# Altium PCB Notecarier-F.PcbDoc (part 1 of 3)
Units mm, origin at the board's own origin, x right, y up, seen from the top; angles counter-clockwise.
Board outline 50.8 x 103 mm, 4 copper layers (Top Layer, Mid Layer 3, Mid Layer 4, Bottom Layer), stack 1.58 mm thick; 102 components, 110 nets, 555 pads, 589 vias.
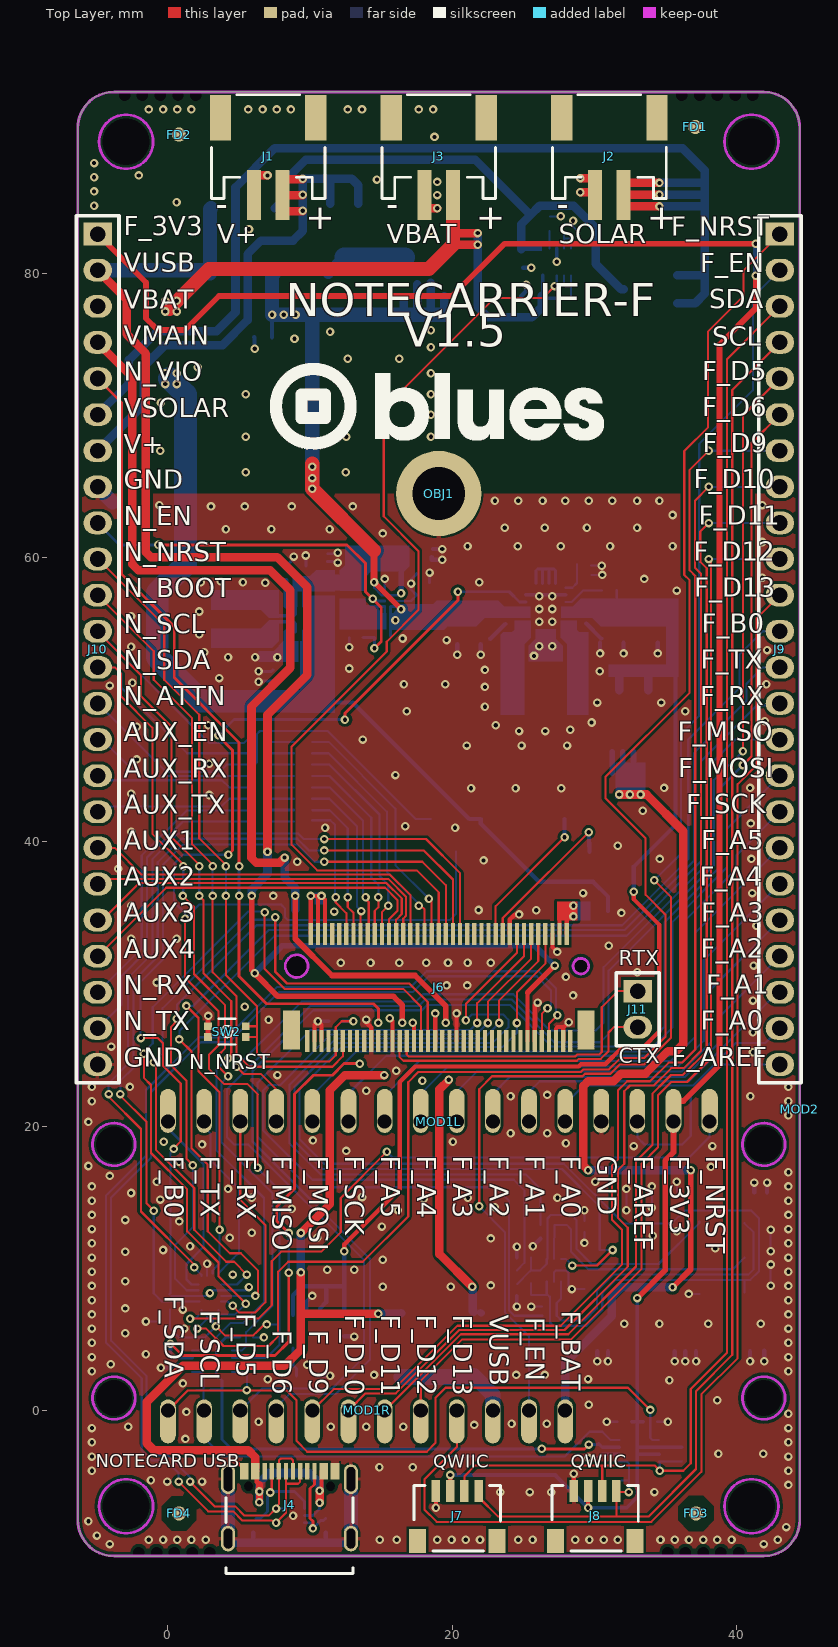
[diagram p0: Top Layer view]
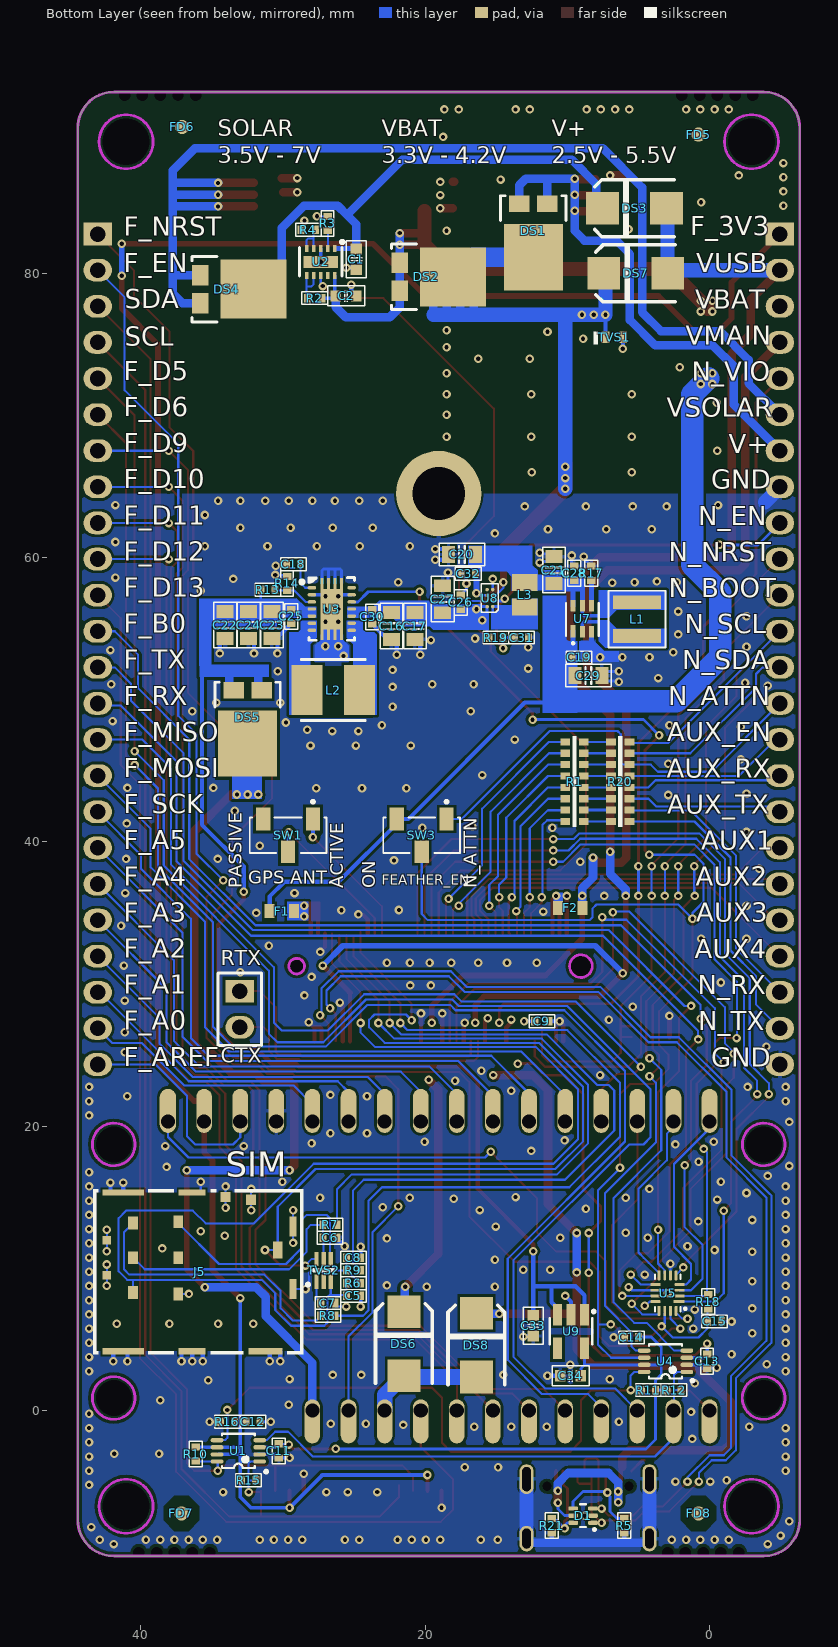
[diagram p1: Bottom Layer view, seen from below]
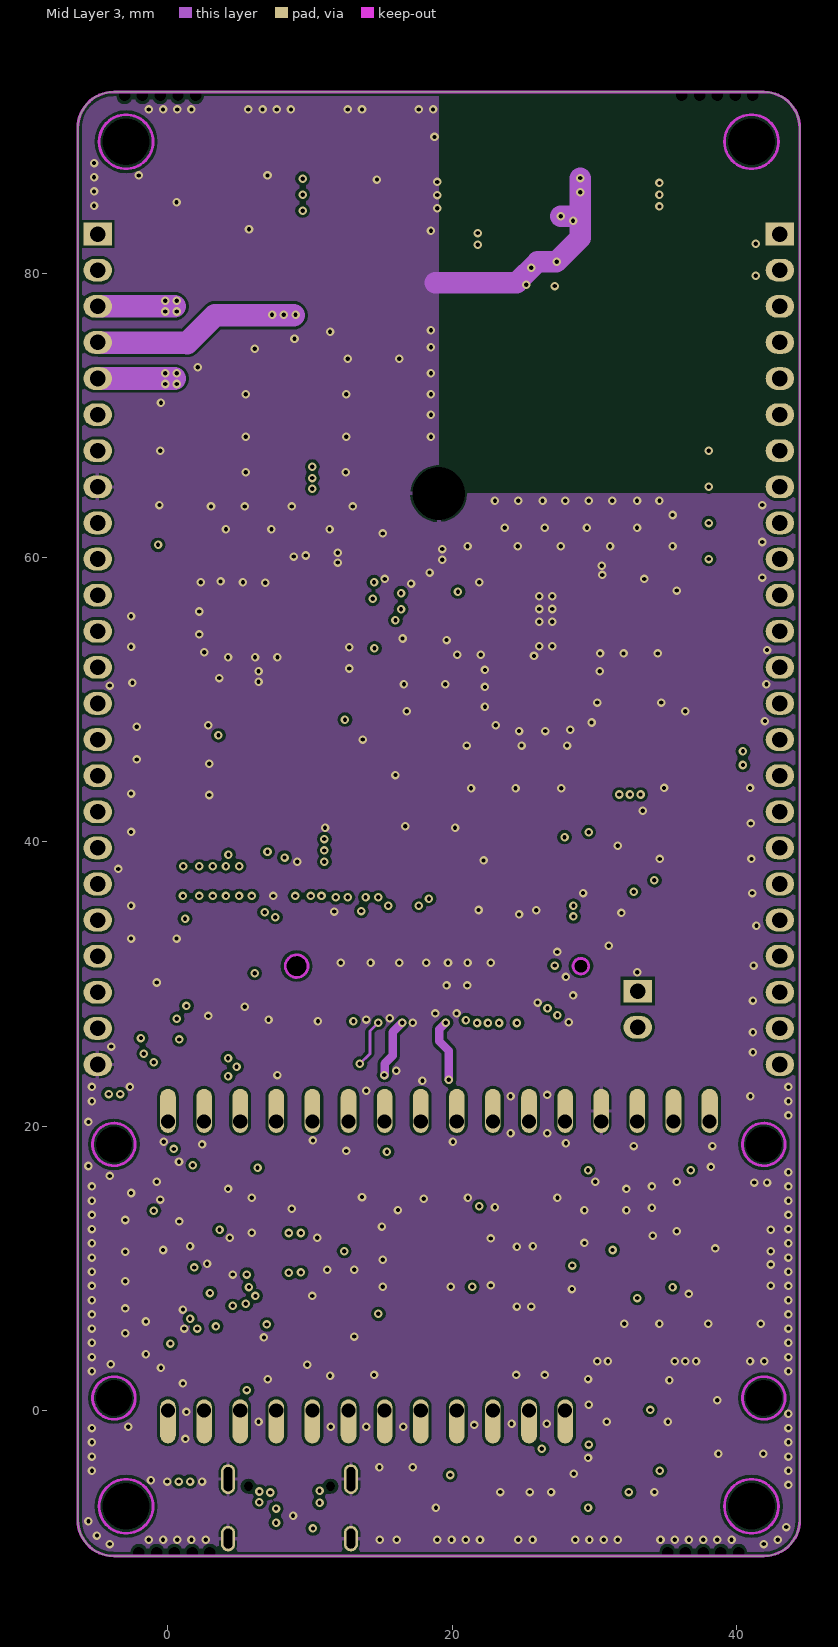
[diagram p2: Mid Layer 3]
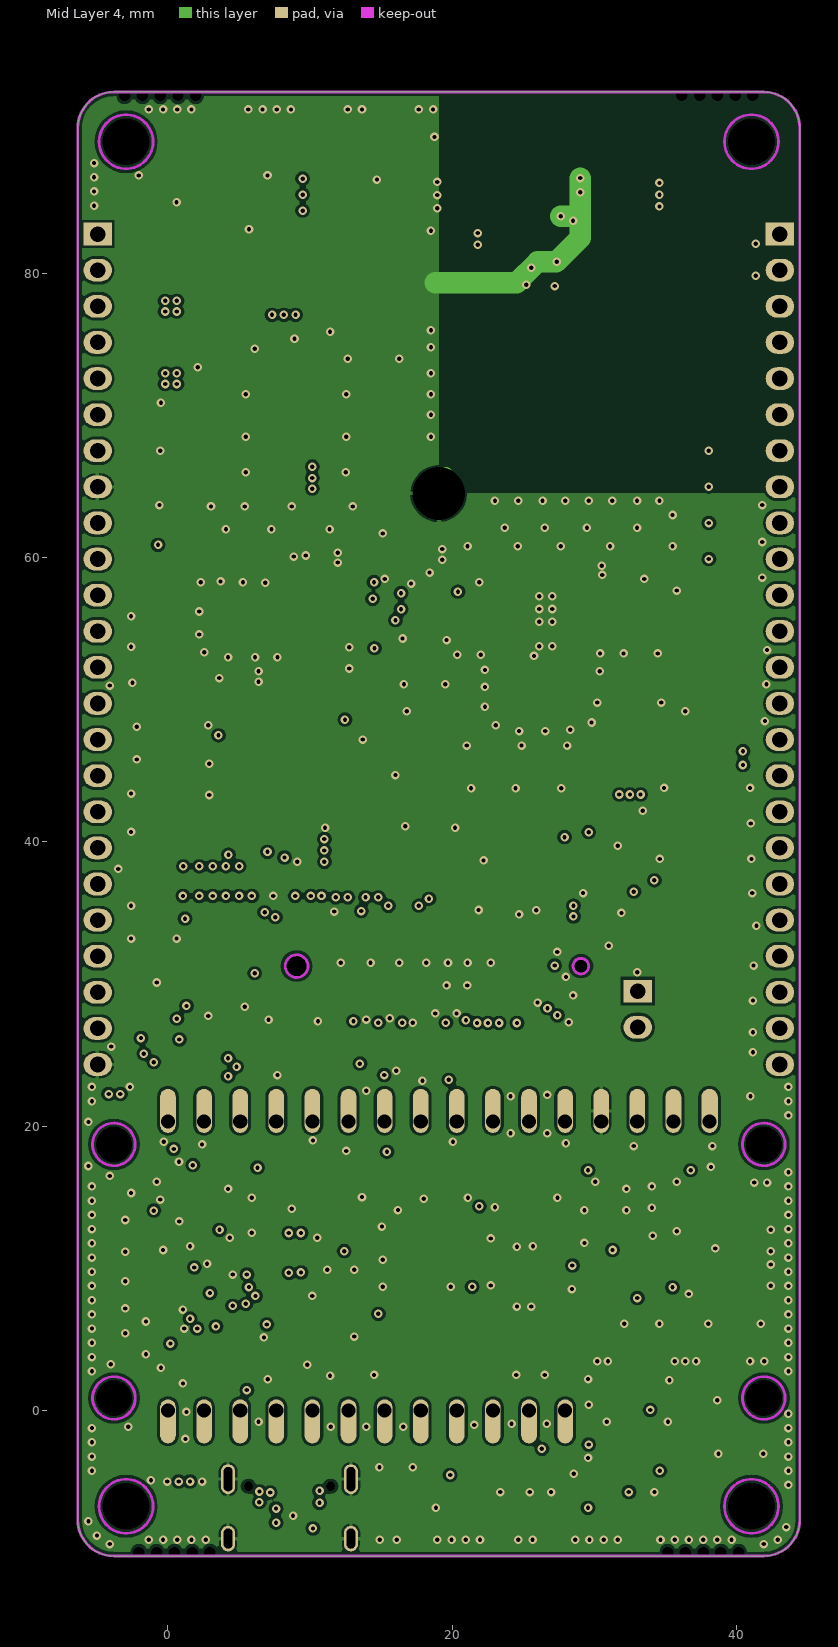
[diagram p3: Mid Layer 4]

## Layer stack, top to bottom
Top Solder: solder mask 0.0152, Solder Resist, Dk 3.5
Top Layer: signal copper 0.0483
Top Prepreg: prepreg 0.1092, Dk 4.2
Mid Layer 3: signal copper 0.0356
Bottom Core: core 1.1938, Dk 4.2
Mid Layer 4: signal copper 0.0356
Bottom Prepreg: prepreg 0.1092, Dk 4.2
Bottom Layer: signal copper 0.0483
Bottom Solder: solder mask 0.0152, Solder Resist, Dk 3.5

## Board outline
-6.35,-7.7 ccw(c-3.81,-7.7) -3.81,-10.24 41.91,-10.24 ccw(c41.91,-7.7) 44.45,-7.7 44.45,90.22 ccw(c41.91,90.22) 41.91,92.76 -3.81,92.76 ccw(c-3.81,90.22) -6.35,90.22

## Design rules (kind name [scope] priority, off if disabled: settings)
Clearance "Clearance Polygon" [InPoly] p1: gap=0.2 ignorepadtopadclearanceinfootprint=FALSE except(0: Arc-Hole Track-Hole SMDPad-Hole THPad-Hole Via-Hole Fill-Hole Poly-Hole Region-Hole Text-Hole)
Clearance [InAnyNet vs InAnyNet] p2: gap=0.15 ignorepadtopadclearanceinfootprint=FALSE except(0: Arc-Hole Track-Hole SMDPad-Hole THPad-Hole Via-Hole Fill-Hole Poly-Hole Region-Hole Text-Hole)
ComponentClearance ComponentClearance_SidePins [HasFootprint('PCB_Contact_side_0.7mm') vs HasFootprint('PCB_Contact_side_0.7mm')] p1: gap=0 collisioncheckmode=3 verticalgap=0 showdistances=FALSE
ComponentClearance ComponentClearance_GNSSantenna [InComponent('R38') vs InComponent('ANT3')] p2: gap=0 collisioncheckmode=3 verticalgap=0 showdistances=FALSE
ComponentClearance ComponentClearance_SW_jumper [InComponent('R28') vs InComponent('S1')] p3: gap=0 collisioncheckmode=3 verticalgap=0 showdistances=FALSE
ComponentClearance ComponentClearance_Shield [InComponent('SHIELD1')] p4: gap=0 collisioncheckmode=3 verticalgap=0 showdistances=FALSE
ComponentClearance ComponentClearance_PCBAntena [(HasFootprint('ANTENNA 2.4 GHZ PCB MICRO SIZE') or HasFootprint('Fiducial mark 1mm'))] p5: gap=0 collisioncheckmode=3 verticalgap=0 showdistances=FALSE
ComponentClearance [All] p6: gap=0.1 collisioncheckmode=3 verticalgap=0.254 showdistances=FALSE
DiffPairsRouting [InDifferentialPairClass('All Differential Pairs')] p1: maxlimit=0.2 minlimit=0.2 mostfreqgap=0.2 toplayer_minwidth=0.15 toplayer_maxwidth=0.15 toplayer_prefwidth=0.15 midlayer1_minwidth=0.15 midlayer1_maxwidth=0.15 midlayer1_prefwidth=0.15 midlayer2_minwidth=0.15 midlayer2_maxwidth=0.15 midlayer2_prefwidth=0.15 bottomlayer_minwidth=0.15 bottomlayer_maxwidth=0.15 bottomlayer_prefwidth=0.15 maxuncoupledlength=20
FabricationTestPointUsage TestPointUsage [All] p1: valid=0 allowmultiple=FALSE
FabricationTestpoint Testpoint [All] p1: side=3 testpointundercomponent=TRUE minsize=1.016 maxsize=2.54 preferedsize=1.524 minholesize=0 maxholesize=1.016 preferedholesize=0.813 testpointgrid=0.025 allowsidetop=TRUE allowsidebottom=TRUE usegrid=TRUE gridtolerance=0
HoleSize [All] p1: absolutevalues=TRUE maxlimit=5.08 minlimit=0.1 maxpercent=80.000 minpercent=20.000
HoleToHoleClearance [All] p1: gap=0.2 allowstackedmicrovias=TRUE
MinimumSolderMaskSliver [All] p1: minsoldermaskwidth=0
NetAntennae [InNet('NetA1_1')] p1: netantennaetolerance=500
PasteMaskExpansion [All] p1: expansion=-0.025
PlaneClearance [All] p1: clearance=0.3
PlaneConnect PlaneConnect_Via [Isvia] p1: planeconnectstyle=Direct reliefexpansion=0.508 reliefentries=4 reliefconductorwidth=0.254 reliefairgap=0.254
PlaneConnect [All] p2: planeconnectstyle=Relief reliefexpansion=0.2 reliefentries=4 reliefconductorwidth=0.25 reliefairgap=0.2
PolygonConnect PolygonConnect_Shield [HasFootprint('SHIELD CUSTOM NRF52832 MODULE')] p1: connectstyle=Direct reliefconductorwidth=0.254 reliefentries=4 polygonreliefangle="90 Angle" airgapwidth=0.254
PolygonConnect PolygonConnect_Via [IsVia] p2: connectstyle=Direct reliefconductorwidth=0.254 reliefentries=4 polygonreliefangle="90 Angle" airgapwidth=0.254
PolygonConnect [All] p3: connectstyle=Relief reliefconductorwidth=0.254 reliefentries=4 polygonreliefangle="90 Angle" airgapwidth=0.15
RoutingVias [All] p1: holewidth=0.3 width=0.6 viastyle="Through Hole" minholewidth=0.1 minwidth=0.3 maxholewidth=0.3 maxwidth=0.6
ShortCircuit "PCB Antenna" [(HasFootprint('Antenna 2.4 GHz PCB Small Size'))] p1: allowed=TRUE
ShortCircuit [All] p2: allowed=FALSE
SilkToSilkClearance [All] p1: silktosilkclearance=0.01
SilkToSolderMaskClearance SilkscreenOverComponentPads [IsPad] p1: minsilkscreentomaskgap=0.1 clearancetoexposedcopper=TRUE
SolderMaskExpansion [All] p1: expansion=0.1 istentingtop=FALSE
Width [All] p1: maxlimit=2 minlimit=0.15 preferedwidth=0.15 checkconnectedcopper=TRUE
16 further rules are at their usual default settings.

## Classes and differential pairs
differential pair D: +D_P -D_N

## Components (designator, comment, footprint, x,y, rotation, side; value= is the part's Value field where it differs from the comment)
C1 "1u" C-0603 24.845,80.985 r90 bottom
C2 "1u" C-0603 25.575,78.41 r0 bottom
C5 "100n" C-0402 25.05,8.06 r0 bottom
C6 "33p" C-0402 26.7,12.16 r0 bottom
C7 "33p" C-0402 26.85,7.56 r0 bottom
C8 "33p" C-0402 25.05,10.76 r0 bottom
C9 "100n" C-0402 11.8,27.385 r0 bottom
C11 "100n" C-0402 30.3,-2.84 r270 bottom
C12 "100n" C-0402 32.125,-0.79 r180 bottom
C13 "100n" C-0402 0.175,3.46 r270 bottom
C14 "100n" C-0402 5.5,5.135 r0 bottom
C15 "100n" C-0402 -0.35,6.26 r0 bottom
C16 "22u" C-0805 22.375,55.185 r90 bottom
C17 "22u" C-0805 20.725,55.185 r90 bottom
C18 "100n" C-0402 29.275,59.535 r180 bottom
C19 "100n" C-0402 9.175,52.975 r0 bottom
C20 "22u" C-0805 17.425,60.225 r0 bottom
C21 "22u" C-0805 10.95,59.125 r270 bottom
C22 "22u" C-0805 34.075,55.26 r270 bottom
C23 "22u" C-0805 30.775,55.26 r270 bottom
C24 "22u" C-0805 32.425,55.26 r270 bottom
C25 "100n" C-0402 29.425,55.86 r90 bottom
C26 "100n" C-0402 17.5,56.85 r270 bottom
C27 "22u" C-0805 18.775,57.075 r270 bottom
C28 "100n" C-0402 9.525,58.9 r270 bottom
C29 "22u" C-0805 8.525,51.7 r180 bottom
C30 "100n" C-0402 23.725,55.835 r90 bottom
C31 "100n" C-0402 13.225,54.375 r0 bottom
C32 "100n" C-0402 16.975,58.875 r180 bottom
C33 "1u" C-0603 12.4,5.96 r90 bottom
C34 "1u" C-0603 9.775,2.435 r180 bottom
D1 "D5V0F4U6V-7" SOT-563 8.9,-7.4 r90 bottom
DS1 "FSV1045V" TO277-3 12.4,82.135 r0 bottom
DS2 "FSV1045V" TO277-3 19.05,79.76 r270 bottom
DS3 "STPS3H100U" SMB 5.275,84.585 r0 bottom
DS4 "FSV1045V" TO277-3 33.075,78.885 r270 bottom
DS5 "FSV1045V" TO277-3 32.5,47.91 r0 bottom
DS6 "STPS3H100U" SMB 21.5,4.7 r90 bottom
DS7 "STPS3H100U" SMB 5.2,80 r0 bottom
DS8 "STPS3H100U" SMB 16.4,4.6 r90 bottom
F1 "SF-0603F150-2" FS-0603 30.1,35.135 r180 bottom
F2 "046703.5NR" FS-0603 9.8,35.36 r0 bottom
FD1 "Fiducial mark" "Fiducial mark 1mm" 37.1,90.3 r0 top
FD2 "Fiducial mark" "Fiducial mark 1mm" 0.775,89.76 r0 top
FD3 "Fiducial mark" "Fiducial mark 1mm" 37.15,-7.24 r0 top
FD4 "Fiducial mark" "Fiducial mark 1mm" 0.775,-7.24 r0 top
FD5 "Fiducial mark" "Fiducial mark 1mm" 0.775,89.76 r180 bottom
FD6 "Fiducial mark" "Fiducial mark 1mm" 37.1,90.3 r180 bottom
FD7 "Fiducial mark" "Fiducial mark 1mm" 37.15,-7.24 r180 bottom
FD8 "Fiducial mark" "Fiducial mark 1mm" 0.775,-7.24 r180 bottom
J1 "S2BPHSM4TBLFSN" "JST S2B-PH-SM4-TB" 7.05,89.76 r0 top locked
J2 "S2BPHSM4TBLFSN" "JST S2B-PH-SM4-TB" 31.05,89.76 r0 top locked
J3 "S2BPHSM4TBLFSN" "JST S2B-PH-SM4-TB" 19.05,89.76 r0 top locked
J4 "12402012E212A" CONN_12402012E212A 8.55,-6.64 r0 top
J5 "SF72S006VBDR2500" J-NANOSIM-SF72S006VBA 36.5,9.76 r270 bottom locked
J6 "MDT420E01001" J-75-0050-MOS-M2 19.05,29.76 r180 top locked
J7 "SM04B-SRSS-TB(LF)(SN)" "JST SM04B-SRSS-TB" 20.35,-7.683 r180 top
J8 "SM04B-SRSS-TB(LF)(SN)" "JST SM04B-SRSS-TB" 30.05,-7.683 r180 top locked
J9 "12736" CES-124-01-S-S 43.05,82.76 r0 top locked
J10 "12736" CES-124-01-S-S -4.95,82.76 r0 top locked
J11 "CES-102-01-S-S" CONN_02 33.05,29.5 r0 top
L1 "2u2" IND_XFL4020-222MEC 5.1,55.675 r90 bottom
L2 "1.5uH" VCHA042A-1R5MS6 26.475,50.685 r180 bottom
L3 "2u2" 1285AS-H-2R2M=P2-INDC2016X100N 13,57.375 r270 bottom
MOD1L "00542" 16PIN_254MM 38.1,20.32 r180 top
MOD1R "00536" 12PIN_254MM 27.94,0 r180 top
MOD2 "Feather Module" BLUES_WIRELESS_SWAN_2-54_HEADERS 44.45,21.19 r180 top locked
OBJ1 "9774025151R" DIST-WASMSIM0250 19.05,64.51 r0 top locked
R1 "100R" RESCAV80P640X160X70-16N 9.5,44.235 r90 bottom
R2 "10k" R-0402 27.775,78.26 r180 bottom
R3 "470R" R-0402 26.875,83.51 r270 bottom
R4 "10k" R-0402 28.225,83.06 r180 bottom
R5 "5k1" R-0402 6,-8.1 r90 bottom
R6 "15k" R-0402 25.05,8.96 r0 bottom
R7 "22R" R-0402 26.7,13.06 r0 bottom
R8 "22R" R-0402 26.85,6.66 r0 bottom
R9 "22R" R-0402 25.05,9.86 r0 bottom
R10 "10k" R-0402 36.15,-3.065 r90 bottom
R11 "10k" R-0402 4.3,1.435 r180 bottom
R12 "10k" R-0402 2.5,1.435 r0 bottom
R13 "1M1" R-0402 31.075,57.735 r0 bottom
R14 "180k" R-0402 29.725,58.185 r270 bottom
R15 "10k" R-0402 32.425,-4.915 r0 bottom
R16 "10k" R-0402 33.925,-0.79 r0 bottom
R17 "82k" R-0402 8.325,58.9 r90 bottom
R18 "100k" R-0402 0.1,7.66 r270 bottom
R19 "10M" R-0402 15.025,54.375 r0 bottom
R20 "100R" RESCAV80P640X160X70-16N 6.275,44.235 r90 bottom
R21 "5k1" R-0402 11.1,-8.1 r270 bottom
SW1 "CJS-1200TA" SW_CJS-1200TA 29.65,40.46 r0 bottom
SW2 "EVP-BB2A9B000" SW_EVP-BB2A9B000 4.15,26.66 r180 top
SW3 "CJS-1200TA" SW_CJS-1200TA 20.25,40.46 r0 bottom
TVS1 "ESDA7P120-1U1M" DIOC_160X100X60 6.7,75.5 r0 bottom
TVS2 "PESD5V0L5UV,125" SOT666 27.15,9.86 r180 bottom
U1 "TXS0102DCUR" SOP50P310X90-8N 33.15,-2.84 r0 bottom
U2 "BQ24210DQCT" WSON10-EXP 27.353,80.807 r270 bottom
U3 "TPS63020DSJR" "TI PVSON-14 DSJ" 26.575,56.385 r180 bottom
U4 "TXS0102DCUR" SOP50P310X90-8N 3.1,3.46 r0 bottom
U5 "NX3L2467GU,115" QFN40P180X260X55-16N 2.95,8.26 r0 bottom
U7 "MAX17225ELT+" MAX17225ELT+UDFN 9.6,54.775 r90 bottom
U8 "TPS62748YFPT" TPS62748YFPT-DSBGA4x2 15.25,56.55 r0 bottom
U9 "AP2139AK-3.3TRG1" SOT-23-5(M5) 9.747,5.56 r0 bottom

## Footprints (in the part's own frame and the unit in brackets; to place one, negate y for a bottom-side part, rotate by r counter-clockwise, add the part's x,y. Pads: shape width x height; smd on the part's side, far side on the other; paste and mask are expansions set on the pad)
12PIN_254MM [mm]
  rrect100% 1.1x3.1 hole 1 copper offset 0,0.762: 1(0,0) 2(2.54,0) 3(5.08,0) 4(7.62,0) 5(10.16,0) 6(12.7,0) 7(15.24,0) 8(17.78,0) 9(20.32,0) 10(22.86,0) 11(25.4,0) 12(27.94,0)
  body extent -1.27,-1.52 29.21,1.52, height 5.09
16PIN_254MM [mm]
  rrect100% 1.16x3.1 hole 1 copper offset 0,-0.762: 1(0,0)
  rrect100% 1.1x3.1 hole 1 copper offset 0,-0.762: 2(2.54,0) 3(5.08,0) 4(7.62,0) 5(10.16,0) 6(12.7,0) 7(15.24,0) 8(17.78,0) 9(20.32,0) 10(22.86,0) 11(25.4,0) 12(27.94,0) 13(30.48,0) 14(33.02,0) 15(35.56,0) 16(38.1,0)
  body extent -1.27,-1.52 39.37,1.52, height 5.09
1285AS-H-2R2M=P2-INDC2016X100N [mm]
  rect 1.2x1.82 smd: 1(-0.86,0) 2(0.86,0)
  body extent -1,-0.8 1,0.8, height 1.2
BLUES_WIRELESS_SWAN_2-54_HEADERS [mm]
C-0402 [mm] "Chip Capacitor; Body 1 x 0.5 mm (LxW typ)"
  rect 0.5x0.6 smd paste-0.025 mask+0.05: 1(-0.5,0) 2(0.5,0)
  silkscreen extent -0.9,-0.45 0.9,0.45, body extent -0.5,-0.28 0.5,0.28, height 0.5
C-0603 [mm] "Chip Capacitor; Body 1.6 x 0.8 mm (LxW typ)"
  rect 0.75x0.8 smd paste-0.025: 1(-0.725,0) 2(0.725,0)
  silkscreen extent -1.3,-0.7 1.3,0.7, body extent -0.8,-0.48 0.8,0.44, height 0.8
C-0805 [mm] "Chip Capacitor; Body 2.0 x 1.2 mm (LxW typ)"
  rect 0.9x1.2 smd paste-0.025: 1(-0.95,0) 2(0.95,0)
  silkscreen extent -1.6,-0.8 1.6,0.8, body extent -1,-0.6 1,0.6, height 0.94
CES-124-01-S-S [mm] "24x1 0.1\" female headers"
  rect 2x1.6 hole 1.1: 1(0,0)
  oval 2x1.6 hole 1.1: 2(0,-2.54) 3(0,-5.08) 4(0,-7.62) 5(0,-10.16) 6(0,-12.7) 7(0,-15.24) 8(0,-17.78) 9(0,-20.32) 10(0,-22.86) 11(0,-25.4) 12(0,-27.94) 13(0,-30.48) 14(0,-33.02) 15(0,-35.56) 16(0,-38.1) 17(0,-40.64) 18(0,-43.18) 19(0,-45.72) 20(0,-48.26) 21(0,-50.8) 22(0,-53.34) 23(0,-55.88) 24(0,-58.42)
  silkscreen extent -1.5,-59.7 1.5,1.3, body extent -1.52,-59.7 1.52,1.26, height 5.09
CONN_02 [mm] "0.1\" 2 PIN header"
  rect 2x1.6 hole 1.1: 1(0,0)
  oval 2x1.6 hole 1.1: 2(0,-2.54)
  silkscreen extent -1.5,-3.84 1.5,1.3
CONN_12402012E212A [mm] "Amphenol USB C receptacle"
  round 0 hole 0.65 unplated: 0(-2.89,1.308) 0(2.89,1.308)
  rect 0.3x1.15 smd: A1(-3.35,2.373) A4(-2.55,2.373) A5(-1.25,2.373) A6(-0.25,2.373) A7(0.25,2.373) A8(1.25,2.373) A9(2.55,2.373) A12(3.35,2.373) B1(3.05,2.373) B4(2.25,2.373) B5(1.75,2.373) B6(0.75,2.373) B7(-0.75,2.373) B8(-1.75,2.373) B9(-2.25,2.373) B12(-3.05,2.373)
  oval 0.6x1.4 smd: M(-4.32,-2.372)
  oval 1x1.8 smd: M(-4.32,-2.372) M(4.32,-2.372)
  oval 1x1.8 hole 0.6 slot 1.4 at 90 deg: M(-4.32,-2.372) M(4.32,-2.372)
  oval 1x2.1 smd: M(-4.32,1.808) M(4.32,1.808)
  oval 1x2.1 hole 0.6 slot 1.7 at 90 deg: M(-4.32,1.808) M(4.32,1.808)
  silkscreen extent -4.48,-4.83 4.48,0.5, body extent -4.47,-4.98 4.47,2.62, height 3.32
DIOC_160X100X60 [mm] "Drawn by: Duracic; Verified by: *"
  rect 0.55x0.8 smd paste-0.025 mask+0.1: 1(-0.625,0) 2(0.625,0)
  silkscreen extent 1.15,-0.4 1.45,0.5, body extent -0.8,-0.5 0.8,0.5, height 0.61
DIST-WASMSIM0250 [mm]
  round 6 smd paste-10: 1(0,0)
  round 6 / inner round 1.524 / far side round 6 hole 3.7: 1(0,0)
  body extent -2.55,-2.55 2.55,2.55, height 2.5
"Fiducial mark 1mm" [mm] "1 mm diameter"
  round 1 smd paste+0 mask+0.6: 1(0,0)
  Top Layer pour cut-out: -1.25,0.5 -0.5,1.25 0.5,1.25 1.25,0.5 1.25,-0.5 0.5,-1.25 -0.5,-1.25 -1.25,-0.5
FS-0603 [mm]
  rect 0.7x1 smd: 1(-0.85,0) 2(0.85,0)
  body extent -0.8,-0.43 0.8,0.43, height 0.86
IND_XFL4020-222MEC [mm]
  rect 0.98x3.4 smd: 1(-1.185,0) 2(1.185,0)
  silkscreen extent -2,-2 2,2
J-75-0050-MOS-M2 [mm]
  rect 0.3x1.55 smd: 1(-9.25,3.775) 2(-9,-3.775) 3(-8.75,3.775) 4(-8.5,-3.775) 5(-8.25,3.775) 6(-8,-3.775) 7(-7.75,3.775) 8(-7.5,-3.775) 9(-7.25,3.775) 10(-7,-3.775) 11(-6.75,3.775) 12(-6.5,-3.775) 13(-6.25,3.775) 14(-6,-3.775) 15(-5.75,3.775) 16(-5.5,-3.775) 17(-5.25,3.775) 18(-5,-3.775) 19(-4.75,3.775) 20(-4.5,-3.775) 21(-4.25,3.775) 22(-4,-3.775) 23(-3.75,3.775) 24(-3.5,-3.775) 25(-3.25,3.775) 26(-3,-3.775) 27(-2.75,3.775) 28(-2.5,-3.775) 29(-2.25,3.775) 30(-2,-3.775) 31(-1.75,3.775) 32(-1.5,-3.775) 33(-1.25,3.775) 34(-1,-3.775) 35(-0.75,3.775) 36(-0.5,-3.775) 37(-0.25,3.775) 38(0,-3.775) 39(0.25,3.775) 40(0.5,-3.775) 41(0.75,3.775) 42(1,-3.775) 43(1.25,3.775) 44(1.5,-3.775) 45(1.75,3.775) 46(2,-3.775) 47(2.25,3.775) 48(2.5,-3.775) 49(2.75,3.775) 50(3,-3.775) 51(3.25,3.775) 52(3.5,-3.775) 53(3.75,3.775) 54(4,-3.775) 55(4.25,3.775) 56(4.5,-3.775) 57(4.75,3.775) 58(5,-3.775) 59(5.25,3.775) 60(5.5,-3.775) 61(5.75,3.775) 62(6,-3.775) 63(6.25,3.775) 64(6.5,-3.775) 65(6.75,3.775) 66(7,-3.775) 67(7.25,3.775) 68(7.5,-3.775) 69(7.75,3.775) 70(8,-3.775) 71(8.25,3.775) 72(8.5,-3.775) 73(8.75,3.775) 74(9,-3.775) 75(9.25,3.775)
  round 0 hole 1.1 unplated: AH(-10,-1.5)
  round 0 hole 1.6 unplated: AH(10,-1.5)
  rect 1.2x2.75 smd: ""(-10.35,3) ""(10.35,3)
  body extent -10.95,-4.37 10.95,4.33, height 4.1
J-NANOSIM-SF72S006VBA [mm]
  rect 0.9x0.7 smd: 1(1.46,-4.05) 2(-0.98,-4.05) 3(-3.42,-4.05) 5(1.56,-0.88) 6(-0.98,-0.88) 7(-3.52,-0.88)
  rect 0.45x2.9 smd: 8(-5.575,-4.75) 17(5.6,-4.75)
  rect 0.45x1.9 smd: 9(-5.575,0.1) 16(5.6,0.1)
  rect 0.7x0.7 smd: 10(-5.25,2.45)
  rect 0.75x0.7 smd: 11(-5.075,4.25)
  rect 1.4x0.5 smd: 12(-3.18,7.2) 14(1.22,7.2)
  rect 1.2x0.65 smd: 13(-1.53,6.125)
  rect 0.45x2.4 smd: 15(5.6,5.25)
  rect 0.6x0.6 smd: 18(0.24,-5.9) 19(-2.2,-5.9)
  Top Layer pour cut-out: 5.6,-6.65 -5.6,-6.65 -5.6,7.7 5.6,7.7 5.6,-6.65
  silkscreen extent -5.8,-6.85 5.8,7.9, body extent -5.58,-7.43 5.64,7.62, height 1.25
"JST S2B-PH-SM4-TB" [mm] "JST PH Series 2mm pitch, side entry connector"
  rect 1x3.5 smd paste-5: 1(-1,-4.25) 2(1,-4.25)
  rect 1.5x3.2 smd: M(-3.35,1.2) M(3.35,1.2)
  silkscreen extent -4,-4.5 4,2.8, body extent -3.95,-5.6 3.95,3.01, height 5.6
"JST SM04B-SRSS-TB" [mm] "1.0mm pitch/Disconnectable Crimp style connector"
  rect 0.6x1.55 smd: 1(-1.5,-2.032) 2(-0.5,-2.032) 3(0.5,-2.032) 4(1.5,-2.032)
  rect 1.2x1.7 smd: M(-2.8,1.5) M(2.8,1.5)
  silkscreen extent -3.03,-2.41 3.03,2.2, body extent -3,-2.38 3,2.57, height 2.95
MAX17225ELT+UDFN [mm]
  rect 0.9x0.35 smd: 1(0.05,0)
  rect 0.8x0.35 smd: 2(0,-0.65) 3(0,-1.3) 4(1.83,-1.3) 5(1.83,-0.65) 6(1.83,0)
  silkscreen extent -0.88,-1.81 2.03,0.51, body extent -0.11,-1.68 1.94,0.38, height 0.79
QFN40P180X260X55-16N [mm] "Drawn by: Duracic; Verified by: Klaic"
  rrect50% 0.8x0.2 smd paste-0.025 mask+0.05: 1(-0.8,0.6)
  rrect50% 0.7x0.2 smd paste-0.025 mask+0.05: 2(-0.85,0.2) 3(-0.85,-0.2) 4(-0.85,-0.6) 9(0.85,-0.6) 10(0.85,-0.2) 11(0.85,0.2) 12(0.85,0.6)
  rrect50% 0.2x0.7 smd paste-0.025 mask+0.05: 5(-0.6,-1.25) 6(-0.2,-1.25) 7(0.2,-1.25) 8(0.6,-1.25) 13(0.6,1.25) 14(0.2,1.25) 15(-0.2,1.25) 16(-0.6,1.25)
  silkscreen extent -1.33,-1.3 0.9,1.3, body extent -0.91,-1.31 0.91,1.31, height 0.56
R-0402 [mm] "Chip Resistor; Body 1 x 0.5 mm (LxW typ)"
  rect 0.5x0.6 smd paste-0.025 mask+0.05: 1(-0.5,0) 2(0.5,0)
  silkscreen extent -0.9,-0.45 0.9,0.45, body extent -0.5,-0.25 0.5,0.25, height 0.38
RESCAV80P640X160X70-16N [mm] "Drawn by:Duracic; Verified by: Klaic"
  rect 0.5x0.7 smd paste-0.025 mask+0.05: 1(-2.8,-0.65) 2(-2,-0.65) 3(-1.2,-0.65) 4(-0.4,-0.65) 5(0.4,-0.65) 6(1.2,-0.65) 7(2,-0.65) 8(2.8,-0.65) 9(2.8,0.65) 10(2,0.65) 11(1.2,0.65) 12(0.4,0.65) 13(-0.4,0.65) 14(-1.2,0.65) 15(-2,0.65) 16(-2.8,0.65)
  silkscreen extent -3.2,-0.15 3.2,0.15, body extent -3.2,-0.8 3.2,0.8, height 0.51
SMB [mm] "DO-214-AA/SMB; 2 C-Bend Leads; Body 5.3 x 3.6 mm, inc. leads (LxW)"
  rect 2.3x2.3 smd: 1(2.25,0) 2(-2.25,0)
  silkscreen extent -2.8,-2 2.8,2, body extent -2.79,-1.98 2.79,1.98, height 2.64
SOP50P310X90-8N [mm] "SOP50P310X90-8N Chip body 2.3x 2.0 mm"
  oval 0.9x0.3 smd mask+0.05: 1(-1.5,0.75) 2(-1.5,0.25) 3(-1.5,-0.25) 4(-1.5,-0.75) 5(1.5,-0.75) 6(1.5,-0.25) 7(1.5,0.25) 8(1.5,0.75)
  silkscreen extent -2.05,-1.2 1.15,1.56, body extent -1.58,-1.2 1.58,1.2, height 1.05
SOT666 [mm]
  rect 0.3x0.99 smd: 1(-0.5,-0.805) 2(0,-0.805) 3(0.5,-0.805) 4(0.5,0.805) 5(0,0.805) 6(-0.5,0.805)
  silkscreen extent -1.18,-1.08 0.7,0, body extent -0.79,-0.8 0.8,0.8, height 0.6
SOT-23-5(M5) [mm]
  rect 0.6x1.5 smd: 1(-0.95,-1.175) 2(0,-1.175) 3(0.95,-1.175) 4(0.95,1.175) 5(-0.95,1.175)
  silkscreen extent -1.7,-1.5 1.5,0.9, body extent -1.5,-1.5 1.5,1.5, height 1.45
SOT-563 [mm] "SOT-563; 6 Leads; Body 1.6 x 1.6 mm, inc. leads (LxW max)"
  rrect50% 0.3x0.67 smd paste-0.025 mask+0.05: 1(-0.5,-0.7) 2(0,-0.7) 3(0.5,-0.7) 4(0.5,0.7) 5(0,0.7) 6(-0.5,0.7)
  silkscreen extent -1.04,-0.87 0.8,0.2, body extent -0.8,-0.81 0.8,0.81, height 0.6
SW_CJS-1200TA [mm]
  rect 1x1.6 smd: 1(-1.75,-1.15) 2(0,1.15) 3(1.75,-1.15)
  silkscreen extent -2.7,-2.46 2.7,1.25, body extent -2.7,-1.4 2.7,1.4, height 2.5
SW_EVP-BB2A9B000 [mm] "Drawn by: Duracic; Verified by: Klaic"
  rect 0.55x0.55 smd paste-0.025 mask+0.1: 1(-1.325,-0.375) 1(-1.325,0.375) 2(1.325,-0.375) 2(1.325,0.375)
  Top Layer pour cut-out: -0.95,0.8 0.95,0.8 0.95,-0.8 -0.95,-0.8
  silkscreen extent -0.6,-0.9 0.6,0.9, body extent -1.5,-0.9 1.5,0.9, height 0.51
"TI PVSON-14 DSJ" [mm] "VSON, 14-Leads, Body 3.00x4.00mm, Pitch 0.50mm, Thermal Pad 1.58x2.85mm, IPC Medium Density"
  oval 0.6x0.24 smd: 1(-1.4,1.5) 2(-1.4,1) 3(-1.4,0.5) 4(-1.4,0) 5(-1.4,-0.5) 6(-1.4,-1) 7(-1.4,-1.5) 8(1.4,-1.5) 9(1.4,-1) 10(1.4,-0.5) 11(1.4,0) 12(1.4,0.5) 13(1.4,1) 14(1.4,1.5)
  rect 0.2x0.775 smd: 15(-0.69,-1.8) 15(-0.69,1.8) 15(-0.23,-1.8) 15(-0.23,1.8) 15(0.23,-1.8) 15(0.23,1.8) 15(0.69,-1.8) 15(0.69,1.8)
  rect 1.58x2.85 smd: 15(0,0)
  silkscreen extent -2.23,-2.2 1.6,2.21, body extent -1.58,-2.07 1.58,2.08, height 1
TO277-3 [mm]
  rect 1.45x1.15 smd: 1(0.985,-2.75) 2(-0.985,-2.75)
  rect 4.15x4.65 smd: 3(0,1)
  silkscreen extent -2.3,-3.32 2.3,-1.58, body extent -2.31,-3.32 2.32,3.33, height 1.2
TPS62748YFPT-DSBGA4x2 [mm]
  round 0.245 smd: A1(0,0) A2(0.4,0) B1(0,-0.4) B2(0.4,-0.4) C1(0,-0.8) C2(0.4,-0.8) D1(0,-1.2) D2(0.4,-1.2)
  silkscreen extent -0.4,-1.6 0.8,0.4, body extent -0.3,-1.5 0.7,0.3, height 0.69
VCHA042A-1R5MS6 [mm] "1.5uH Precision Wire Wound Inductor, 2-Leads, Body 4.20x4.00mm, IPC Medium Density"
  rect 2.2x3.5 smd: 1(-1.85,0) 2(1.85,0)
  silkscreen extent -2.25,-2.15 2.25,2.15, body extent -2.2,-2 2.2,2, height 2.2
WSON10-EXP [mm]
  rect 0.5x0.25 smd: 1(-0.95,1) 2(-0.95,0.5) 3(-0.95,0) 4(-0.95,-0.5) 5(-0.95,-1) 6(0.95,-1) 7(0.95,-0.5) 8(0.95,0) 9(0.95,0.5) 10(0.95,1)
  rect 0.84x2.4 smd: 11(0,0)
  silkscreen extent -1.5,-1.5 1,1.6, body extent -1,-1.5 1,1.5, height 0.8

## Part data
C1 C2 C33 C34: library part C0603-1u-25V-X5R, "Capacitor ceramic 1u ±10% X5R 25V", BL Part Number=2006-223, Manufacturer=Yageo, Manufacturer Part Number=CC0603KRX5R8BB105, Supplier Part Number 1=311-1445-1-ND, Checked_By=Golubic, DateModified=2022-10-07, Drawn_By=Hamin, Supplier 1=Digi-Key
C5 C9 C11 C12 C13 C14 C15 C18 C19 C25 C26 C28 C30 C31 C32: library part C0402-100n-16V-X7R, "Capacitor ceramic 100n ±10% X7R 16V 0402", BL Part Number=2000-908, Manufacturer=N/A, Supplier Part Number 1=490-3261-1-ND, Checked_By=Dodig, DateModified=27-08-2013, Drawn_By=Puskar, Manufacturer Part Number=N/A, Supplier 1=Digi-Key
C6 C7 C8: library part C0402-33p-50V-C0G-5, "Capacitor ceramic 33p ±5% C0G 50V 0402", BL Part Number=2001-377, Manufacturer=N/A, Supplier Part Number 1=1276-1272-1-ND, Checked_By=Dodig, DateModified=24-11-2013, Drawn_By=Puskar, Manufacturer Part Number=N/A, Supplier 1=Digi-Key
C16 C17 C20 C21 C22 C23 C24 C27 C29: library part C0805-22u-16V-X5R, "Capacitor ceramic 22u ±10% X5R 16V 0805", BL Part Number=2006-222, Manufacturer=N/A, Checked_By=Hamin, DateModified=28-07-2022, Drawn_By=Fumic, Manufacturer Part Number=N/A
D1: "TVS DIODE 5.5VWM 12VC SOT563", BL Part Number=2010-391, Manufacturer="Diodes Incorporated", DateModified=21-01-2026, Drawn_By=Duracic, Manufacturer Part Number=D5V0F4U6V-7
DS1 DS2 DS4 DS5: library part "SCHOTTKY - FSV1045V - 10A/45V", "DIODO SCHOTTKY 10A 45V FSV1045V TO277-3 SMT", BL Part Number=2007-712, Manufacturer=onsemi, Supplier Part Number 1=FSV1045VCT-ND, Drawn_By="Blues Wireless", Manufacturer Part Number=FSV1045V, Supplier 1=Digi-Key
DS3 DS6 DS7 DS8: library part "SCHOTTKY-STPS3H100U - 3A/100V", "DIODO SCHOTTKY 3A 100V STPS3H100U SMB SMT", BL Part Number=2007-711, Manufacturer=STMicroelectronics, Supplier Part Number 1=497-10392-1-ND, Drawn_By="Blues Wireless", Manufacturer Part Number=STPS3H100U, Supplier 1=Digi-Key
F1: library part "RAPIDO - SF-0603F150-2-1.5A/32V", "FUSIBILE RAPIDO 1.5A 32V 0603 SF-0603F150-2 BOURNS SMT", BL Part Number=2007-468, Manufacturer="Bourns Inc.", Supplier Part Number 1=SF-0603F150-2CT-ND, Drawn_By="Blues Wireless", Manufacturer Part Number=SF-0603F150-2, Supplier 1=Digi-Key
F2: "Fuse Chip Very Fast Acting 3.5A 32V SMD Solder Pad 0603 T/R CSA", BL Part Number=2007-469, Manufacturer="Littelfuse Inc.", Supplier Part Number 1=F1400CT-ND, Drawn_By="Blues Wireless", Manufacturer Part Number=046703.5NR, Supplier 1=Digi-Key
FD1 FD2 FD3 FD4 FD5 FD6 FD7 FD8: BL Part Number=N/A, Checked_By=Dodig, DateModified=17-06-2013, Drawn_By=Puskar, Manufacturer=N/A, Manufacturer Part Number=N/A
J1 J2 J3: "PH SMT SIDE ENTRY HDR 2W", BL Part Number=2007-662, Manufacturer=JST, Manufacturer Part Number="S2B-PH-SM4-K-TB (LF)(SN)", Drawn_By="Blues Wireless", Supplier 1=Digi-Key
J4: library part "Conn USB C 12402012E212A", "CONN RCP USB2.0 TYP C 24P SMD RA", BL Part Number=2008-437, Manufacturer=Amphenol, Supplier Part Number 1=664-12402012E212ATR-ND, Checked_By=Hlupic, DateModified=19-03-2024, Drawn_By=Anic-Ivicic, Manufacturer Part Number=12402012E212A, Supplier 1=Digi-Key
J5: library part "NANOSIM - J-NANOSIM-SF72S006VBA", "CONN. NANOSIM 8P F/90° PUSH-PUSH SF72S006VBAR2500 JAE ELECTRONICS SMT", BL Part Number=2007-458, Manufacturer="JAE Electronics", Supplier Part Number 1=670-2967-1-ND, Drawn_By="Blues Wireless", Manufacturer Part Number=SF72S006VBDR2500, Supplier 1=Digi-Key
J6: library part "AMPHENOL-75 - M-2 KEY E_13", "CONN. M.2 75P M/90° P=0.5 MDT420E01001 AMPHENOL SMT", BL Part Number=2007-460, Manufacturer="Amphenol ICC (FCI)", Manufacturer Part Number=MDT420E03001, Supplier Part Number 1=MDT420E03001CT-ND, Drawn_By="Blues Wireless", Supplier 1=Digi-Key
J7 J8: "CONN HEADER SH 4POS SIDE 1MM TIN", BL Part Number=2002-058, Manufacturer="JST Sales America Inc.", Supplier Part Number 1=455-1804-1-ND, Drawn_By="Blues Wireless", Manufacturer Part Number=SM04B-SRSS-TB(LF)(SN), Supplier 1=Digi-Key
J9: library part SIDECON, "24x1 0.1\" pitch half height female header", BL Part Number=2010-425, Manufacturer=4UCON, Drawn_By="Blues Wireless", Manufacturer Part Number=12736
J10: library part SIDECON_N, "24x1 0.1\" pitch half height female header", BL Part Number=2010-425, Manufacturer=4UCON, Drawn_By="Blues Wireless", Manufacturer Part Number=12736
J11: library part CONN_02, "0,1\" 2 PIN Header", BL Part Number=2007-461, Manufacturer="Samtec Inc.", Supplier Part Number 1=SAM1085-02-ND, Drawn_By="Blues Wireless", Manufacturer Part Number=CES-102-01-S-S, Supplier 1=Digi-Key
L1: library part XFL4020-222MEC, "Power Inductors - SMD 2.2Uh Shld 8A 23.5mOhms AECQ2", BL Part Number=2007-483, Manufacturer 1=Coilcraft, Supplier Part Number 1=994-XFL4020-222MEC, Drawn_By="Blues Wireless", Manufacturer Part Number 1=XFL4020-222MEC, Supplier 1=Mouser
L2: library part VCHA042A-1R5MS6, "Fixed Ind 1.5UH 7.3A 15.4 Mohm", BL Part Number=2007-451, Manufacturer=Cyntec, Supplier Part Number 1=2037-VCHA042A-1R5MS6CT-ND, Drawn_By="Blues Wireless", Manufacturer Part Number=VCHA042A-1R5MS6, Supplier 1=Digi-Key
L3: library part 1285AS-H-2R2M=P2, "FIXED IND 2.2UH 1.5A 204MOHM SMD", BL Part Number=2007-482, Manufacturer="Murata Electronics", Manufacturer Part Number=1285AS-H-2R2M=P2, Supplier Part Number 1=490-10600-1-ND, Drawn_By="Blues Wireless", Supplier 1=Digi-Key
MOD1L: library part SOCKET_LFB_16, "Socket 16-Pin, 0.100 in", BL Part Number=2010-423, Manufacturer=4UCON, Drawn_By="Blues Wireless", Manufacturer Part Number=00542
MOD1R: library part SOCKET_LFB_12, "Socket 12-Pin, 0.100 in", BL Part Number=2010-424, Manufacturer=4UCON, Drawn_By="Blues Wireless", Manufacturer Part Number=00536
MOD2: library part ADAFRUIT_FEATHER_COMMON_1, "Typical Adafruit Feather Pinout"
OBJ1: library part "DISTANZIALE - M2.5x0250", "DISTANZ. CIL. METALLO 5.1X2.5 9774025151R W.E SMT", BL Part Number=6020-113, Manufacturer="Würth Elektronik", Supplier Part Number 1=732-7078-1-ND, Drawn_By="Blues Wieless", Manufacturer Part Number=9774025151R, Supplier 1=Digi-Key
R1 R20: library part "RESCAV80P640X160X70-16N - 8x100R", "Resistor array 100R 5% 2506", BL Part Number=2007-472, Manufacturer="CTS Resistor Products", Manufacturer Part Number=742C163101JP, Supplier Part Number 1=742C163101JPCT-ND, Checked_By=Klaic, DateModified=26-11-2025, Drawn_By=Duracic, Supplier 1=Digi-Key
R2 R4 R10 R11 R12 R15 R16: library part R0402-10k-1, "Resistor 10k ±1% 0402", BL Part Number=2000-729, Manufacturer=N/A, Supplier Part Number 1=311-10.0KLRCT-ND, Checked_By=Dodig, DateModified=27-08-2013, Drawn_By=Puskar, Manufacturer Part Number=N/A, Supplier 1=Digi-Key
R3: library part R0402-470R-1, "Resistor 470R ±1% 0402", BL Part Number=2001-420, Manufacturer=N/A, Supplier Part Number 1=13-RC0402FR-13470RLCT-ND, Checked_By=Marsic, DateModified=10-07-2023, Drawn_By=Hamin, Manufacturer Part Number=N/A, Supplier 1=Digi-Key
R5 R21: library part R0402-5k1-1, "Resistor 5k1 ±1% 0402", BL Part Number=2004-098, Manufacturer=N/A, Supplier Part Number 1=P5.10KLCT-ND, Checked_By=Hamin, DateModified=21-09-2018, Drawn_By=PuskarJ, Manufacturer Part Number=N/A, Supplier 1=Digi-Key
R6: library part R0402-15k-1, "Resistor 15k ±1% 0402", BL Part Number=2001-157, Manufacturer=N/A, Supplier Part Number 1=P15.0KLCT-ND, Checked_By=Zvonc, DateModified=23-01-2015, Drawn_By=Puskar, Manufacturer Part Number=N/A, Supplier 1=Digi-Key
R7 R8 R9: library part R0402-22R-1, "Resistor 22R ±1% 0402", BL Part Number=2001-170, Manufacturer=N/A, Supplier Part Number 1=311-22.0LRCT-ND, Checked_By=Hamin, DateModified=13-02-2021, Drawn_By=Zvonc, Manufacturer Part Number=N/A, Supplier 1=Digi-Key
R13: library part R0402-1M1-1, "Resistor 1M1 ±1% 0402", BL Part Number=2000-730, Manufacturer=N/A, Supplier Part Number 1=13-RC0402FR-071M1LCT-ND, Checked_By=Kvesic, DateModified=09-10-2024, Drawn_By=Hamin, Manufacturer Part Number=N/A, Supplier 1=Digi-Key
R14: library part R0402-180k-1, "Resistor 180k ±1% 0402", BL Part Number=2001-422, Manufacturer=N/A, Checked_By=Hamin, DateModified=15-02-2018, Drawn_By=Dodig, Manufacturer Part Number=N/A
R17: library part R0402-82k-1, "Resistor 82k ±1% 0402", BL Part Number=2001-566, Manufacturer=Yageo, Manufacturer Part Number=RC0402FR-0782KL, Supplier Part Number 1=311-82.0KLRCT-ND, Checked_By=Hamin, DateModified=20-08-2014, Drawn_By=Puskar, Supplier 1=Digi-key
R18: library part R0402-100k-1, "Resistor 100k ±1% 0402", BL Part Number=2000-727, Manufacturer=N/A, Supplier Part Number 1=RHM100CDCT-ND, Checked_By=Dodig, DateModified=27-10-2013, Drawn_By=Puskar, Manufacturer Part Number=N/A, Supplier 1=Digi-Key
R19: library part R0402-10M-1, "Resistor 10M ±1% 0402", BL Part Number=2002-832, Manufacturer=N/A, Supplier Part Number 1=RC0402FR-0710ML, Checked_By=Dodig, DateModified=24-05-2016, Drawn_By=Zvonc, Manufacturer Part Number=N/A, Supplier 1=Digi-Key
SW1 SW3: "Switch Slide N.O./N.C. SPDT Raised Slide 0.1A 24VDC J-Hook SMD Embossed T/R", BL Part Number=2007-456, Manufacturer="Nidec Copal", Supplier Part Number 1=563-1021-6-ND, Drawn_By="Blues Wireless", Manufacturer Part Number=CJS-1200TA, Supplier 1=Digi-Key
SW2: library part "Switch tact EVP-BB2A9B000", "SWITCH TACTILE SPST-NO 0.02A 15V", BL Part Number=2007-124, Manufacturer="Panasonic Electronic Components", Checked_By=Duracic, DateModified=26-11-2025, Drawn_By=Marsic, Manufacturer Part Number=EVP-BB2A9B000
TVS1: "TVS DIODE 5.5VWM 11.5VC 1610", BL Part Number=2007-378, Manufacturer=STMicroelectronics, DateModified=26-01-2026, Drawn_By=Duracic, Manufacturer Part Number=ESDA7P120-1U1M
TVS2: "PESD Series 25 W 5 V Uni-Directional Fivefold ESD Protection Diode Array SOT-666", BL Part Number=2007-452, Manufacturer=Nexperia, Supplier Part Number 1=1727-5797-1-ND, Drawn_By="Blues Wireless", Manufacturer Part Number=PESD5V0L5UV,125, Supplier 1=Digi-Key
U1 U4: "2-Bit Bidirectional Voltage-Level Shifter for Open-Drain and Push-Pull Application 8-VSSOP -40 to 85", BL Part Number=2007-455, Manufacturer="Texas Instruments", Supplier Part Number 1=296-21931-6-ND, Drawn_By="Blues Wireless", Manufacturer Part Number=TXS0102DCUR, Supplier 1=Digi-Key
U2: library part "BAT-CHARGE - BQ24210DQCT", "INTEGRATO BQ24210DQCT WSON10 TEXAS SMT", BL Part Number=2005-527, Manufacturer="Texas Instruments", Supplier Part Number 1=296-28738-1-ND, Drawn_By="Blues Wireless", Manufacturer Part Number=BQ24210DQCT, Supplier 1=Digi-Key
U3: library part "BUCK-BOOST - TPS63020DSJR", "I.C. DC/DC CONVERTER TPS63020DSJR TEXAS VSON14 SMT", BL Part Number=2002-405, Manufacturer="Texas Instruments", Supplier Part Number 1=296-36491-1-ND, Drawn_By="Blues Wireless", Manufacturer Part Number=TPS63020DSJR, Supplier 1=Digi-Key
U5: "IC ANALOG SWITCH DPDTX2 16XQFN", BL Part Number=2009-148, Manufacturer=NXP, Checked_By=Duracic, DateModified=26-11-2025, Drawn_By=Marsic, Manufacturer Part Number=NX3L2467GU,115
U7: "IC REG BOOST ADJ 1A NANO 6UDFN", BL Part Number=2007-481, Manufacturer=Maxim, Supplier Part Number 1="MAX17225ELT+ -ND", Drawn_By="Blues Wireless", Manufacturer Part Number=MAX17225ELT+, Supplier 1=Digi-Key
U8: "IC REG BUCK PROG 300MA 8DSBGA", BL Part Number=2007-480, Manufacturer="Texas Instruments", Supplier Part Number 1=296-43000-1-ND, Drawn_By="Blues Wireless", Manufacturer Part Number=TPS62748YFPT, Supplier 1=Digi-Key
U9: "IC REG LINEAR 3.3V 250MA SOT23-5", BL Part Number=2006-845, Manufacturer="Diodes Incorporated", Checked_By=Hlupic, DateModified=29-09-2022, Drawn_By=Marsic, Manufacturer Part Number=AP2139AK-3.3TRG1

## Free pads (board coordinates)
  round 0 hole 0.8 unplated: 0(-3.05,95.01) 0(-3.05,92.51) 0(-2.05,-12.49) 0(-2.05,-9.99) 0(-1.8,95.01) 0(-1.8,92.51) 0(-0.8,-12.49) 0(-0.8,-9.99) 0(-0.55,95.01) 0(-0.55,92.51) 0(0.45,-12.49) 0(0.45,-9.99) 0(0.7,95.01) 0(0.7,92.51) 0(1.7,-12.49) 0(1.7,-9.99) 0(1.95,95.01) 0(1.95,92.51) 0(2.95,-12.49) 0(2.95,-9.99) 0(35.15,-9.99) 0(35.15,-12.49) 0(36.15,92.51) 0(36.15,95.01) 0(36.4,-9.99) 0(36.4,-12.49) 0(37.4,92.51) 0(37.4,95.01) 0(37.65,-9.99) 0(37.65,-12.49) 0(38.65,92.51) 0(38.65,95.01) 0(38.9,-9.99) 0(38.9,-12.49) 0(39.9,92.51) 0(39.9,95.01) 0(40.15,-9.99) 0(40.15,-12.49) 0(41.15,92.51) 0(41.15,95.01)
  round 0 hole 2.54 unplated: M(-3.81,0.87) M(-3.81,18.72) M(41.91,0.87) M(41.91,18.72)
  round 0 hole 3.3 unplated: M(-2.95,-6.74) M(-2.95,89.26) M(41.05,-6.74) M(41.05,89.26)

## Via types
v1: diameter 0.6, hole 0.3, Top Layer to Bottom Layer, tented both sides, 589 vias

## Nets (pads, with @x,y where several pads share a name; then routed paths per layer and width w, separated by ;. In a path a pad name is that pad's centre, name@x,y a point inside that pad or via, vN(x,y) a via of type N, cw(c..) or ccw(c..) an arc to the next point about the centre after c; other vN are vias at no path point)
1V8: C20.1 C21.2 C28.2 C32.2 L1.2 L3.1 U7.5 U7.6 U8.C2 | length 8.5
  Bottom Layer w0.2: U8.C2@15.65,57.35 v1@16.4,57.35 ; C20.1@16.4,60.15 C20.1@16.475,60.225
  Bottom Layer w0.25: 7.45,55.905 8.825,55.905 8.95,56.03 U7.5@8.95,56.605
  Bottom Layer w0.35: U7.5@8.95,56.605 8.95,57.675 ; C28.2@9.525,58.4 9.6,58.325 U7.6@9.6,56.605
  Bottom Layer w0.4: v1(16.4,57.5) C20.1@16.4,60.15
A\L\T\_\D\F\U\_\A\C\T\I\V\E\: J6.36 R18.1 U5.2 U5.10 | length 63.9
  Top Layer w0.15: v1(-1.9,26.2) -0.725,26.2 -0.35,25.825 -0.35,24.25 0.9,23 0.9,18.935 0.4,18.435 v1(0.4,18.4) ; v1(11,38.6) 17.9,38.6 19.55,36.95 J6.36@19.55,33.535
  Bottom Layer w0.15: v1@-1.925,26.2 -1.925,30.16 -0.35,31.735 -0.35,38.4 1.075,39.825 9.075,39.825 10.3,38.6 v1(11,38.6) ; R18.1@0.1,8.16 0.175,8.235 0.175,18.175 v1(0.4,18.4) ; R18.1@0.2,8.06 2.75,8.06 v1(2.95,8.26) 3.15,8.46 4.75,8.46 5.47,8.46 v1(5.695,8.685)
ALT_DFU_BOOT: J6.32 U5.5 | length 61.1
  Top Layer w0.15: v1(-4.175,22.26) -4.175,22.075 -1.9,19.8 -1.9,14 1.85,10.25 v1(1.85,10.06) ; v1(11,40.2) 18.15,40.2 20.55,37.8 J6.32@20.55,33.535
  Bottom Layer w0.15: v1(-4.175,22.26) -4.175,23.025 -2.825,24.375 -2.825,30.41 -1.1,32.135 -1.1,38.775 0.725,40.6 9.149,40.6 9.549,40.2 v1(11,40.2) ; v1(1.85,10.06) 2.35,9.56 U5.5@2.35,9.46
ALT_DFU_RESET: J6.34 U5.1 | length 62.3
  Top Layer w0.15: v1(-3.35,22.26) -3.35,22.15 -1.5,20.3 -1.5,14.56 v1(-1,14.06) ; v1(11,39.4) 18,39.4 20.05,37.35 J6.34@20.05,33.535
  Bottom Layer w0.15: v1(-3.35,22.26) -3.35,23.185 -2.425,24.11 -2.425,30.235 -0.725,31.935 -0.725,38.575 0.925,40.225 9.099,40.225 9.924,39.4 v1(11,39.4) ; v1(-1,14.06) -1,8.235 -0.425,7.66 U5.1@2.2,7.66
ALT_DFU_RX: J6.41 U5.9 | length 52.9
  Top Layer w0.15: v1(-1,24.5) -0.85,24.35 -0.85,18.35 1.85,15.65 1.85,12.71 4.1,10.46 4.65,10.46 v1(5.55,9.56) ; v1(7.55,34.7) 7.55,30.91 7.525,30.885 8.375,30.035 16.976,30.035 18.275,28.736 18.275,26.01 J6.41@18.3,25.985
  Bottom Layer w0.15: v1(-1,24.5) -0.375,25.125 -0.375,28.3 5.85,34.525 7.375,34.525 v1(7.55,34.7) ; U5.9@3.75,8.86 4.85,8.86 v1(5.55,9.56)
ALT_DFU_TX: J6.43 U5.13 | length 55.8
  Top Layer w0.15: v1(-1.7,25.1) -1.7,23.4 -1.2,22.9 -1.2,18.11 1.35,15.56 1.35,12.61 3.55,10.41 3.55,9.44 5.49,7.5 v1(5.475,7.5) ; v1(6.8,35.05) 6.8,31.06 8.2,29.66 16.54,29.66 17.8,28.4 J6.43@17.8,25.985
  Bottom Layer w0.15: v1(-1.7,25.1) -1.7,25.2 -1.075,25.825 -1.075,28.375 5.65,35.1 v1@6.85,35.1 ; U5.13@3.55,7.06 3.55,6.86 3.65,6.76 4.735,6.76 v1(5.475,7.5)
ATTN_P: J6.54 R1.11 | length 15
  Top Layer w0.15: J6.54@15.05,33.535 15.05,35.05 v1(15.5,35.5)
  Bottom Layer w0.15: R1.11@10.15,45.435 11.365,45.435 14.875,41.925 14.875,37.6 15.5,36.975 v1(15.5,35.5)
AUX_CHARGING: J6.38 U2.8 | length 66.6
  Top Layer w0.15: J6.38@19.05,33.535 19.05,36.45 17.5,38 10.5,38 8.7,39.8 8.7,46.71 15.39,53.4 15.39,54.09 17.625,56.325 17.625,60.45 15.175,62.9 15.175,70.475 22.96,78.26 26.356,78.26 v1(27.203,79.107) v1@27.203,78.888
  Bottom Layer w0.15: v1@27.353,79.107 U2.8@27.353,79.857
AUX_EN_P: J6.56 R1.12 | length 13.8
  Top Layer w0.15: J6.56@14.55,33.535 14.55,35.15 14.8,35.4 v1(14.8,36.1)
  Bottom Layer w0.15: R1.12@10.15,44.635 11.365,44.635 14.3,41.7 14.3,37.5 14.8,37 v1(14.8,36.1)
AUX_RX_P: J6.58 R1.13 | length 12.7
  Top Layer w0.15: v1(13.9,36.1) 13.9,36 14.125,35.775 14.125,33.61 J6.58@14.05,33.535
  Bottom Layer w0.15: R1.13@10.15,43.835 11.365,43.835 13.725,41.475 13.725,36.275 v1(13.9,36.1)
AUX_TX_P: J6.60 R1.14 | length 11.7
  Top Layer w0.15: v1@13.5,35.135 13.55,35.085 J6.60@13.55,33.535
  Bottom Layer w0.15: R1.14@10.15,43.035 11.365,43.035 13.3,41.1 13.3,35.435 v1(13.6,35.135)
CC1: D1.4 J4.A5 R5.2 | length 7
  Top Layer w0.2: v1@7.259,-5.698 v1(7.185,-5.772) 7.185,-5.664 7.3,-5.549 J4.A5@7.3,-4.267 J4.A5@7.259,-4.308
  Bottom Layer w0.2: R5.2@6.2,-7.6 6.5,-7.6 7,-7.1 7,-6.065 ; v1@7.185,-5.7 8.9,-5.7 9.6,-6.4 D1.4@9.6,-6.9
CC2: D1.6 J4.B5 R21.1 | length 6.3
  Top Layer w0.2: v1(10.2,-8.3) 10.2,-7.792 10,-7.592 10,-5.5 10.3,-5.2 J4.B5@10.3,-4.267
  Bottom Layer w0.2: D1.6@9.6,-7.9 10,-7.9 10.123,-8.023 10.123,-8.223 v1(10.2,-8.3) 10.75,-7.75 10.95,-7.75 R21.1@11.1,-7.6
CTX: J6.49 J11.2 | length 19.7
  Top Layer w0.15: J6.49@16.3,25.985 16.3,24.86 16.56,24.6 28.763,24.6 28.898,24.735 30.45,24.735 30.987,25.272 30.987,26.587 31.371,26.971 J11.2@33.044,26.971
D_N: D1.3 J4.A7 J4.B7 J6.9 | length 80.4
  Top Layer w0.15: v1(1.55,-5) 1.55,-5.025 3.275,-6.75 4.738,-6.75 5.388,-7.4 7.1,-7.4 v1(7.6,-6.9) 7.6,-6.787 7.8,-6.587 J4.B7@7.8,-4.267 7.8,-3.525 7.95,-3.375 8.66,-3.375 8.8,-3.515 J4.A7@8.8,-4.267 ; J6.9@26.3,25.985 26.3,27.9 v1(26.7,28.3)
  Bottom Layer w0.15: v1(1.55,-5) 1.55,-4.705 -0.005,-3.15 -1,-3.15 -1.5,-2.65 -1.5,2.4 -4,4.9 -4,14.985 -1.2,17.785 -1.2,22.4 2.31,25.91 4.295,25.91 7.835,29.45 17.245,29.45 18.347,30.553 25.947,30.553 26.95,29.55 26.95,28.565 26.7,28.315 v1(26.7,28.3) ; v1(7.6,-6.9) D1.3@8.2,-6.9